# Altium PCB PCB.PcbDoc
Units mm, origin at the board's own origin, x right, y up, seen from the top; angles counter-clockwise.
Board outline 95 x 90.01 mm, 4 copper layers (Top Layer, GND, POWER, Bottom Layer), stack 0.778 mm thick; 26 components, 137 nets, 395 pads, 5 vias.
Unrouted connection lines stored in the file: 56.
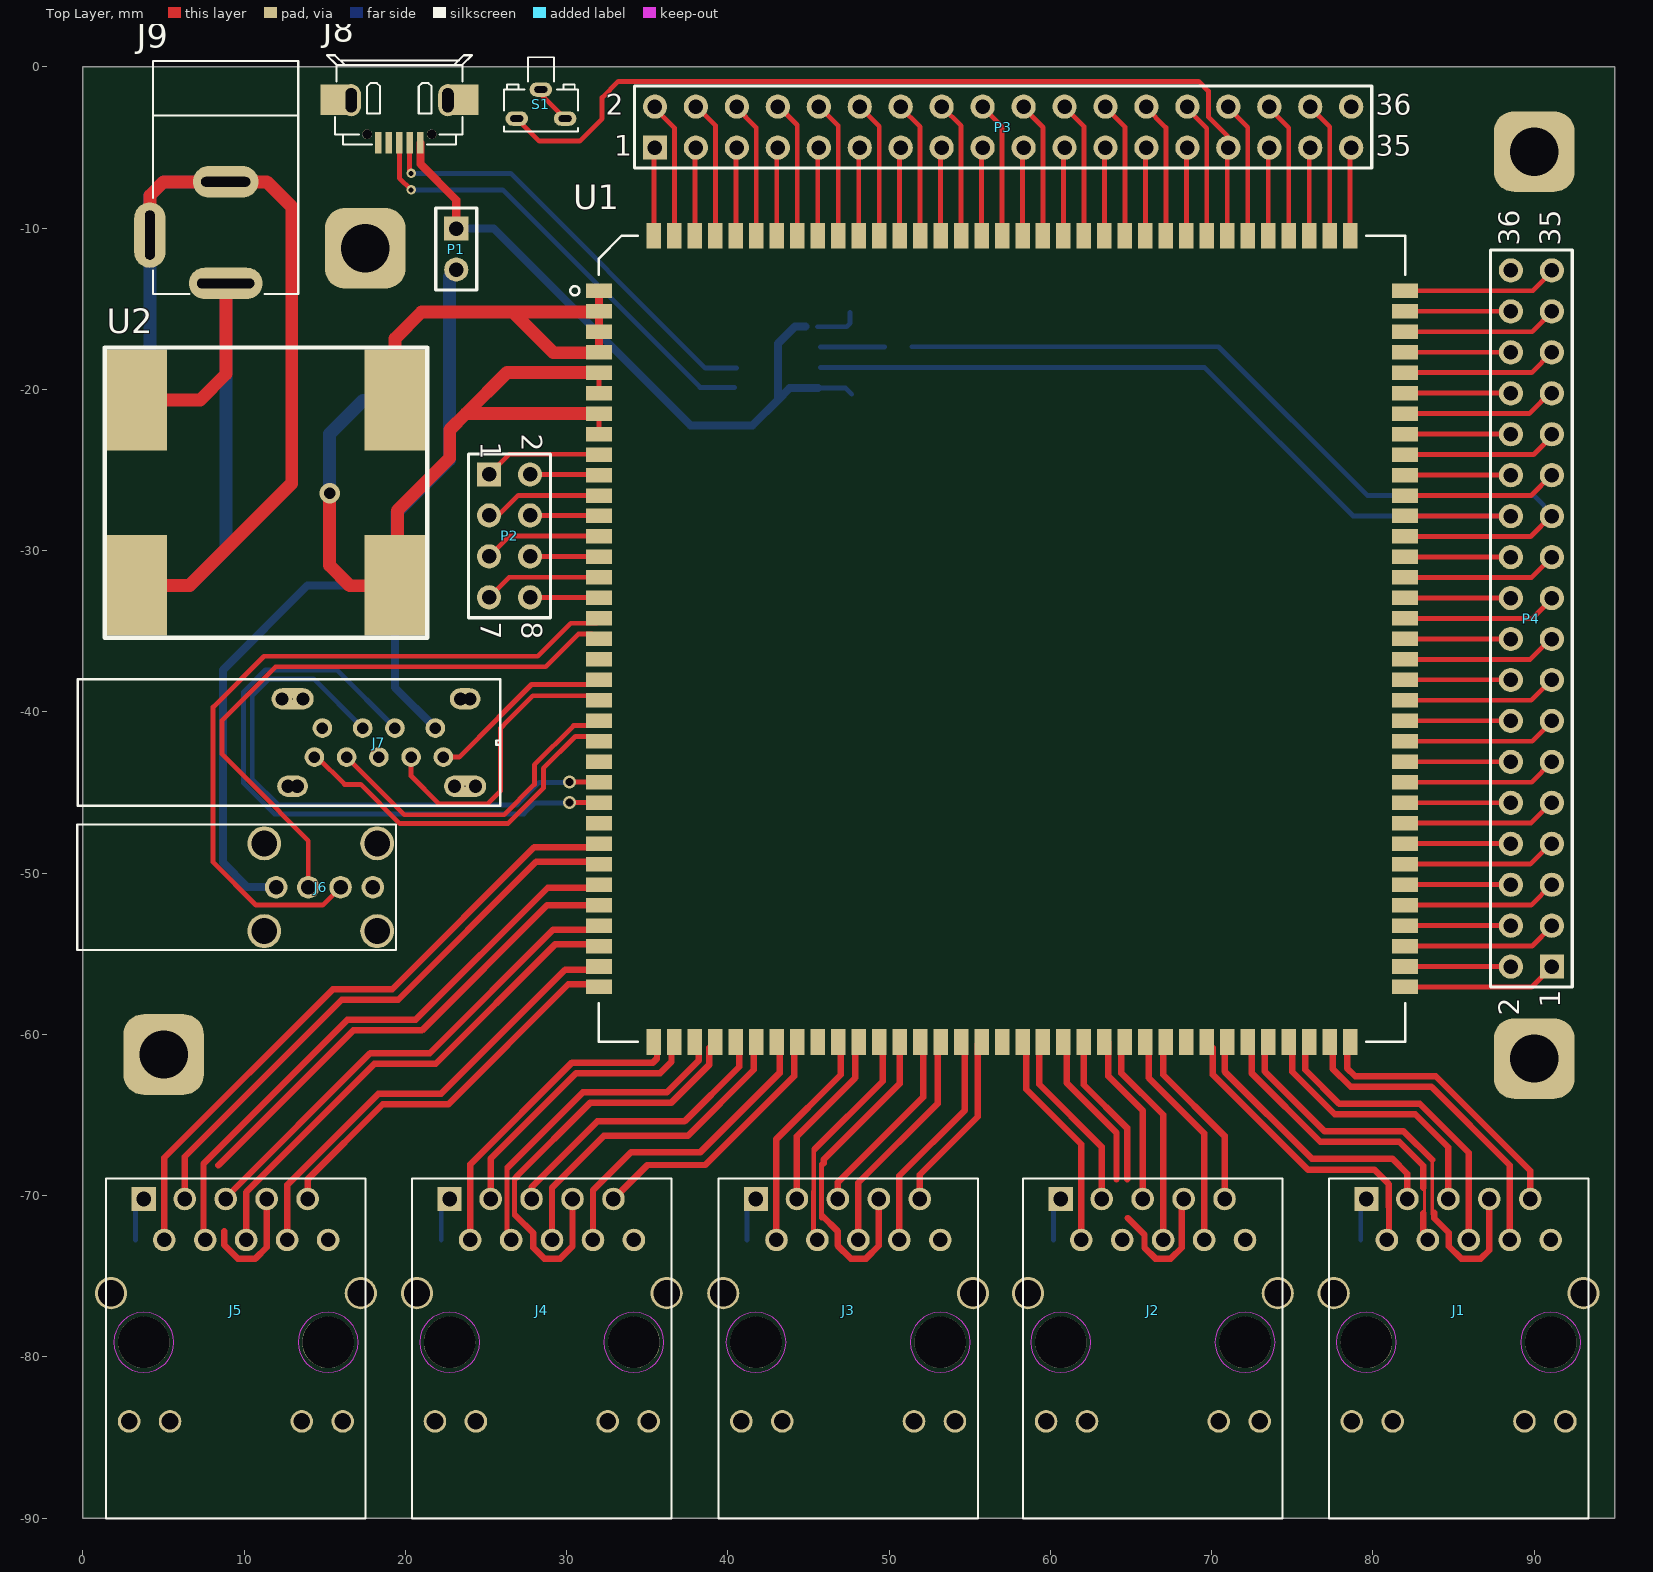
[diagram p0: Top Layer view]
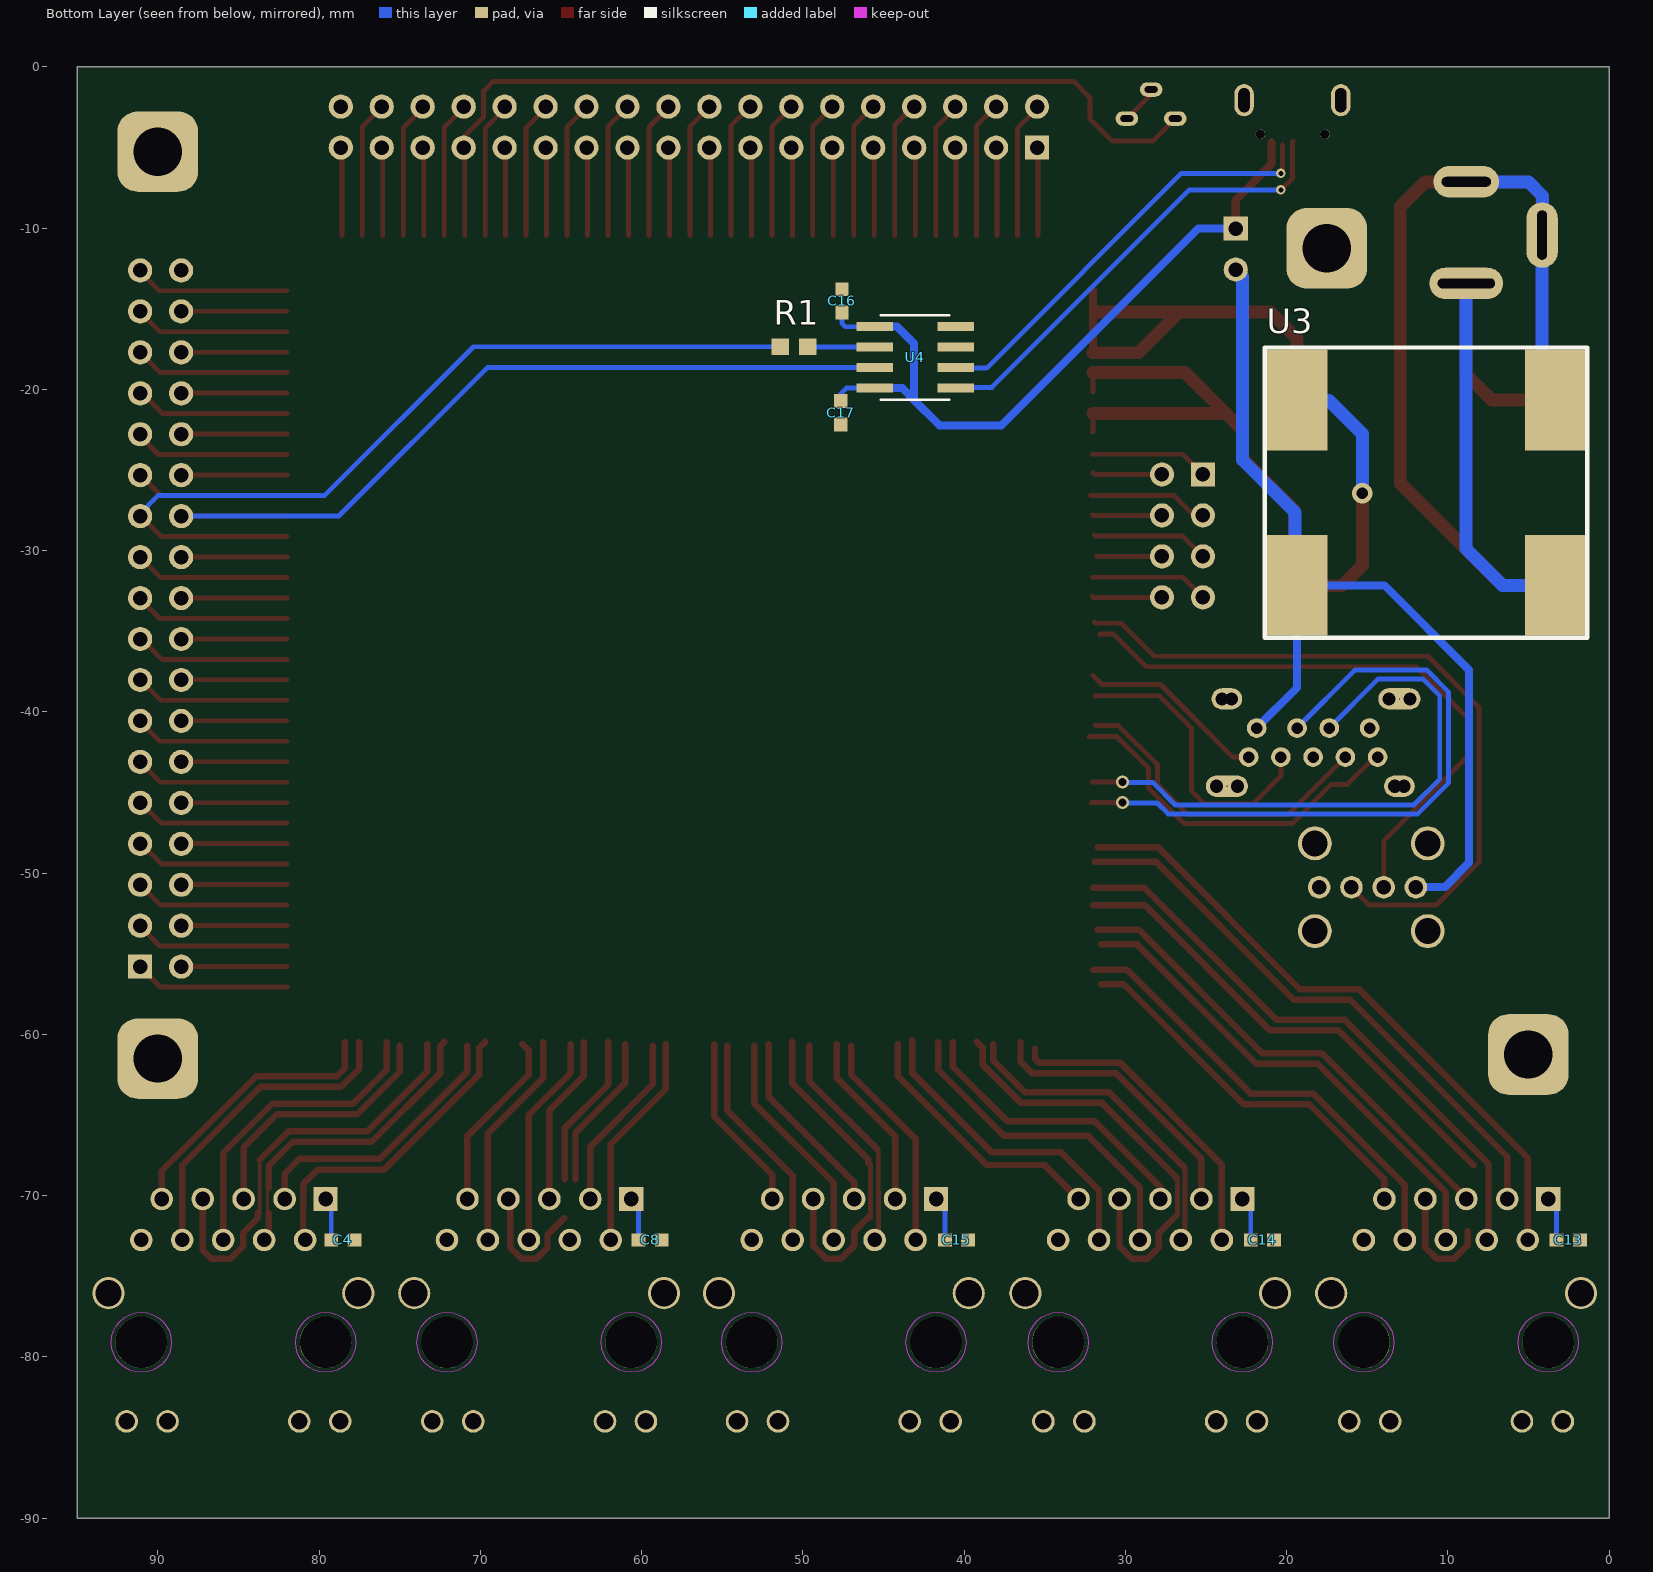
[diagram p1: Bottom Layer view, seen from below]

## Layer stack, top to bottom
Top Solder: solder mask 0.0102, Solder Resist, Dk 3.5
Top Layer: signal copper 0.0356
Dielectric 1: core 0.254, FR-4, Dk 4.2
GND: signal copper 0.036
Dielectric 3: prepreg 0.127, Dk 4.2
POWER: signal copper 0.036
Dielectric 2: core 0.254, Dk 4.2
Bottom Layer: signal copper 0.0356
Bottom Solder: solder mask 0.0102, Solder Resist, Dk 3.5

## Board outline
0,-90.014 0,0 95,0 95,-90.014

## Design rules (kind name [scope] priority, off if disabled: settings)
Clearance [All] p1: gap=0.254 ignorepadtopadclearanceinfootprint=FALSE except(0: Arc-Hole Track-Hole SMDPad-Hole THPad-Hole Via-Hole Fill-Hole Poly-Hole Region-Hole Text-Hole)
PolygonConnect [All] p1: connectstyle=Relief reliefconductorwidth=0.254 reliefentries=4 polygonreliefangle="90 Angle" airgapwidth=0.254
RoutingVias [All] p1: holewidth=0.711 width=1.27 viastyle="Through Hole" minholewidth=0.711 minwidth=1.27 maxholewidth=0.711 maxwidth=1.27
SolderMaskExpansion [All] p1: expansion=0.102
Width [All] p1: maxlimit=0.8 minlimit=0.15 preferedwidth=0.3 toplayer_prefwidth=0.4 minimp=50.000000 maximp=50.000000 favimp=50.000000
30 further rules are at their usual default settings.

## Components (designator, comment, footprint, x,y, rotation, side; value= is the part's Value field where it differs from the comment)
C4 "Cap" C0603 78.529,-72.75 r180 bottom value=0.1uF
C8 "Cap" C0603 59.471,-72.75 r180 bottom value=0.1uF
C13 "Cap" C0603 2.529,-72.75 r180 bottom value=0.1uF
C14 "Cap" C0603 21.5,-72.75 r0 bottom value=0.1uF
C15 "Cap" C0603 40.471,-72.75 r180 bottom value=0.1uF
C16 "Cap" C0603 47.575,-14.504 r270 bottom value=0.1uF
C17 "Cap" C0603 47.65,-21.446 r270 bottom value=0.1uF
J1 "RJ45_HR911130" RJ45_HR911130 79.6,-79.1 r180 top locked
J2 "RJ45_HR911130" RJ45_HR911130 60.64,-79.1 r180 top locked
J3 "RJ45_HR911130" RJ45_HR911130 41.74,-79.1 r180 top locked
J4 "RJ45_HR911130" RJ45_HR911130 22.74,-79.1 r180 top locked
J5 "RJ45_HR911130" RJ45_HR911130 3.77,-79.1 r180 top locked
J6 "USB2.0" USB2.0 11.975,-50.875 r270 top
J7 "USB3.0" USB3.0 21.85,-41 r270 top
J8 "microUSB" MICROusb 19.605,-1.981 r180 top
J9 "PWR2.5" CON\DC-JACK\4.7 8.85,-13.425 r270 top
P1 "Header 2" HDR1X2 23.15,-10.025 r270 top
P2 "Header 4X2" HDR2X4 25.185,-25.275 r270 top
P3 "Header 18X2" HDR2X18 35.475,-5 r0 top
P4 "Header 18X2" HDR2X18 91.1,-55.8 r90 top
R1 "Res2" 3-0603 50.55,-17.35 r180 bottom value=4.7K
S1 "SW_PB" SW_PB 28.4,-1.4 r90 top
U1 "MT7621A" HLK-7621 32,-13.88 r0 top locked
U2 "MP1584EN_MOD" MP1584EN_MOD 1.35,-17.4 r0 top
U3 "MP1584EN_MOD" MP1584EN_MOD 1.35,-35.4 r0 bottom
U4 "CH340N" CH340N 41.038,-20.58 r0 bottom

## Footprints (in the part's own frame and the unit in brackets; to place one, negate y for a bottom-side part, rotate by r counter-clockwise, add the part's x,y. Pads: shape width x height; smd on the part's side, far side on the other; paste and mask are expansions set on the pad)
3-0603 [mm] "Chip Resistor; Body 1.6 x 0.9 mm (LxW typ)"
  rect 1.1x1 smd: 1(-0.85,0) 2(0.85,0)
C0603 [mil]
  rect 33.78x32 smd paste+0 mask+0: 1(-28.39,0) 2(28.39,0)
  body extent 0,0 10,10, height 10
CH340N [mm]
  rect 2.27x0.558 smd paste+0 mask+0: 1(-0.516,-0.66) 2(-0.516,-1.93) 3(-0.516,-3.2) 4(-0.516,-4.47) 5(4.512,-4.47) 6(4.512,-3.2) 7(4.512,-1.93) 8(4.512,-0.66)
  silkscreen extent -0.12,-5.19 4.12,0.06, body extent 2,-2.57 2.25,-2.31, height 0.25
CON\DC-JACK\4.7 [mm]
  oval 1.956x4.572 hole 0.6 slot 3.556 at 90 deg: 1(0,0)
  oval 1.956x4.064 hole 0.6 slot 3.048 at 90 deg: 2(-6.3,0)
  oval 4.064x1.956 hole 0.6 slot 3.048 at 0 deg: 3(-3,-4.7)
  silkscreen extent -13.8,-4.5 0.65,4.5
HDR1X2 [mm] "Connector; Header; 2 Position"
  rect 1.5x1.5 hole 0.9: 1(0,0)
  round 1.5 hole 0.9: 2(2.54,0)
  silkscreen extent -1.27,-1.27 3.81,1.27
HDR2X4 [mm] "Connector; Header; 4x2 Position"
  rect 1.5x1.5 hole 0.9: 1(0,0)
  round 1.5 hole 0.9: 2(0,2.54) 3(2.54,0) 4(2.54,2.54) 5(5.08,0) 6(5.08,2.54) 7(7.62,0) 8(7.62,2.54)
  silkscreen extent -1.27,-1.27 8.89,3.81
HDR2X18 [mm] "Connector; Header; 18x2 Position"
  rect 1.5x1.5 hole 0.9: 1(0,0)
  round 1.5 hole 0.9: 2(0,2.54) 3(2.54,0) 4(2.54,2.54) 5(5.08,0) 6(5.08,2.54) 7(7.62,0) 8(7.62,2.54) 9(10.16,0) 10(10.16,2.54) 11(12.7,0) 12(12.7,2.54) 13(15.24,0) 14(15.24,2.54) 15(17.78,0) 16(17.78,2.54) 17(20.32,0) 18(20.32,2.54) 19(22.86,0) 20(22.86,2.54) 21(25.4,0) 22(25.4,2.54) 23(27.94,0) 24(27.94,2.54) 25(30.48,0) 26(30.48,2.54) 27(33.02,0) 28(33.02,2.54) 29(35.56,0) 30(35.56,2.54) 31(38.1,0) 32(38.1,2.54) 33(40.64,0) 34(40.64,2.54) 35(43.18,0) 36(43.18,2.54)
  silkscreen extent -1.27,-1.27 44.45,3.81
HLK-7621 [mm]
  rect 1.6x0.9 smd: 1(0,0) 2(0,-1.27) 3(0,-2.54) 4(0,-3.81) 5(0,-5.08) 6(0,-6.35) 7(0,-7.62) 8(0,-8.89) 9(0,-10.16) 10(0,-11.43) 11(0,-12.7) 12(0,-13.97) 13(0,-15.24) 14(0,-16.51) 15(0,-17.78) 16(0,-19.05) 17(0,-20.32) 18(0,-21.59) 19(0,-22.86) 20(0,-24.13) 21(0,-25.4) 22(0,-26.67) 23(0,-27.94) 24(0,-29.21) 25(0,-30.48) 26(0,-31.75) 27(0,-33.02) 28(0,-34.29) 29(0,-35.56) 30(0,-36.83) 31(0,-38.1) 32(0,-39.37) 33(0,-40.64) 34(0,-41.91) 35(0,-43.18) 71(50,-43.18) 72(50,-41.91) 73(50,-40.64) 74(50,-39.37) 75(50,-38.1) 76(50,-36.83) 77(50,-35.56) 78(50,-34.29) 79(50,-33.02) 80(50,-31.75) 81(50,-30.48) 82(50,-29.21) 83(50,-27.94) 84(50,-26.67) 85(50,-25.4) 86(50,-24.13) 87(50,-22.86) 88(50,-21.59) 89(50,-20.32) 90(50,-19.05) 91(50,-17.78) 92(50,-16.51) 93(50,-15.24) 94(50,-13.97) 95(50,-12.7) 96(50,-11.43) 97(50,-10.16) 98(50,-8.89) 99(50,-7.62) 100(50,-6.35) 101(50,-5.08) 102(50,-3.81) 103(50,-2.54) 104(50,-1.27) 105(50,0)
  rect 0.9x1.6 smd: 36(3.41,-46.59) 37(4.68,-46.59) 38(5.95,-46.59) 39(7.22,-46.59) 40(8.49,-46.59) 41(9.76,-46.59) 42(11.03,-46.59) 43(12.3,-46.59) 44(13.57,-46.59) 45(14.84,-46.59) 46(16.11,-46.59) 47(17.38,-46.59) 48(18.65,-46.59) 49(19.92,-46.59) 50(21.19,-46.59) 51(22.46,-46.59) 52(23.73,-46.59) 53(25,-46.59) 54(26.27,-46.59) 55(27.54,-46.59) 56(28.81,-46.59) 56(28.81,-46.59) 57(30.08,-46.59) 58(31.35,-46.59) 59(32.62,-46.59) 60(33.89,-46.59) 61(35.16,-46.59) 62(36.43,-46.59) 63(37.7,-46.59) 64(38.97,-46.59) 65(40.24,-46.59) 66(41.51,-46.59) 67(42.78,-46.59) 68(44.05,-46.59) 69(45.32,-46.59) 70(46.59,-46.59) 106(46.59,3.41) 107(45.32,3.41) 108(44.05,3.41) 109(42.78,3.41) 110(41.51,3.41) 111(40.24,3.41) 112(38.97,3.41) 113(37.7,3.41) 114(36.43,3.41) 115(35.16,3.41) 116(33.89,3.41) 117(32.62,3.41) 118(31.35,3.41) 119(30.08,3.41) 120(28.81,3.41) 121(27.54,3.41) 122(26.27,3.41) 123(25,3.41) 124(23.73,3.41) 125(22.46,3.41) 126(21.19,3.41) 127(19.92,3.41) 128(18.65,3.41) 129(17.38,3.41) 130(16.11,3.41) 131(14.84,3.41) 132(13.57,3.41) 133(12.3,3.41) 134(11.03,3.41) 135(9.76,3.41) 136(8.49,3.41) 137(7.22,3.41) 138(5.95,3.41) 139(4.68,3.41) 140(3.41,3.41)
  silkscreen extent -1.78,-46.59 50,3.41
MICROusb [mm]
  oval 1.2x2 hole 0.7 slot 1.5 at 90 deg: 1(-3.028,0.081) 1(2.972,0.081)
  rect 0.4x1.35 smd: 1(1.28,2.719) 2(0.63,2.719) 3(-0.02,2.719) 4(-0.67,2.719) 5(-1.32,2.719)
  round 0.6 hole 0.6: 6(1.98,2.194) 9(-2.02,2.194)
  rect 1.8x1.9 smd: 7(3.98,0.044) 8(-4.02,0.044)
  silkscreen extent -4.52,-2.71 4.48,2.82
MP1584EN_MOD [mm]
  rect 3.75x6.25 smd paste+0 mask+0: 1(2,-3.25) 2(2,-14.75) 3(18,-3.25) 4(18,-14.75)
  silkscreen extent 0,-18 20,0
RJ45_HR911130 [mm]
  rect 1.5x1.5 hole 0.9: 1(0,-8.89)
  round 1.4 hole 0.9: 2(-1.27,-6.35) 3(-2.54,-8.89) 4(-3.81,-6.35) 5(-5.08,-8.89) 6(-6.35,-6.35) 7(-7.62,-8.89) 8(-8.89,-6.35) 9(-10.16,-8.89) 10(-11.43,-6.35)
  round 1.4 hole 1.03: 11(0.91,4.9) 12(-1.63,4.9) 13(-9.8,4.9) 14(-12.34,4.9)
  round 2 hole 1.63: ""(-13.46,-3.05)
  round 3.2 hole 3.2 unplated: ""(-11.43,0) ""(0,0)
  round 2 hole 1.63 unplated: ""(2.03,-3.05)
  Keep-Out Layer pour cut-out: -13.293,0 -13.257,-0.363 -13.151,-0.713 -12.979,-1.035 -12.747,-1.317 -12.465,-1.549 -12.143,-1.721 -11.793,-1.827 -11.43,-1.863 -11.067,-1.827 -10.717,-1.721 -10.395,-1.549 -10.113,-1.317 -9.881,-1.035 -9.709,-0.713 -9.603,-0.363 -9.567,0 -9.603,0.363 -9.709,0.713 -9.881,1.035 -10.113,1.317 -10.395,1.549 -10.717,1.721 -11.067,1.827 -11.43,1.863 -11.793,1.827 -12.143,1.721 -12.465,1.549 -12.747,1.317 -12.979,1.035 -13.151,0.713 -13.257,0.363
  Keep-Out Layer pour cut-out: -1.863,0 -1.827,-0.363 -1.721,-0.713 -1.549,-1.035 -1.317,-1.317 -1.035,-1.549 -0.713,-1.721 -0.363,-1.827 0,-1.863 0.363,-1.827 0.713,-1.721 1.035,-1.549 1.317,-1.317 1.549,-1.035 1.721,-0.713 1.827,-0.363 1.863,0 1.827,0.363 1.721,0.713 1.549,1.035 1.317,1.317 1.035,1.549 0.713,1.721 0.363,1.827 0,1.863 -0.363,1.827 -0.713,1.721 -1.035,1.549 -1.317,1.317 -1.549,1.035 -1.721,0.713 -1.827,0.363
  silkscreen extent -13.76,-10.15 2.33,10.92
SW_PB [mm]
  oval 0.9x1.4 hole 0.4 slot 0.8 at 90 deg: 1(-1.8,1.5) 2(-1.8,-1.5) 3(0,0)
  silkscreen extent -2.6,-2.3 2,2.3
USB2.0 [mm]
  round 1.4 hole 0.9: 1(0,0) 2(0,2) 3(0,4) 4(0,6)
  round 2.1 hole 1.6: 5(2.72,-0.73) 6(-2.72,-0.73) 7(2.72,6.27) 8(-2.72,6.27)
  silkscreen extent -3.9,-12.33 3.9,7.44
USB3.0 [mil]
  round 48 hole 28 mask+0: 1(0,0) 2(0,-98.43) 3(0,-177.17) 4(0,-275.59) 5(70.87,-295.28) 6(70.87,-216.54) 7(70.87,-137.8) 8(70.87,-59.06) 9(70.87,19.68)
  oval 52x75 hole 1 mask+0: S_1(-71.26,72.83) S_4(142.13,-348.43)
  round 32 hole 32 unplated: S_1_H1(-71.26,84.33) S_1_H2(-71.26,61.33) S_2_H1(142.13,98.33) S_2_H2(142.13,47.33) S_3_H1(-71.26,-322.93) S_3_H2(-71.26,-373.93) S_4_H1(142.13,-336.93) S_4_H2(142.13,-359.93)
  oval 52x103 hole 1 mask+0: S_2(142.13,72.83) S_3(-71.26,-348.43)
  Multi-Layer lines w32: -71.26,-373.93 -71.26,-322.93 ; 142.13,-359.93 142.13,-336.93 ; 142.13,47.33 142.13,98.33 ; -71.26,61.33 -71.26,84.33
  silkscreen extent -119,-873 189,159, body extent 0,0 10,10, height 10

## Part data
C4 C8 C13 C14 C15 C16 C17: "Capacitor", LatestRevisionDate=17-Jul-2002, LatestRevisionNote="Re-released for DXP Platform.", PackageDescription="Radial Cap, Thru-Hole; 2 Leads; 0.3 in Pin Spacing", PackageReference=RAD-0.3, Published=8-Jun-2000, Publisher="Altium Limited"
P1: "Header, 2-Pin", LatestRevisionDate=17-Jul-2002, LatestRevisionNote="Re-released for DXP Platform.", Publisher="Altium Limited"
P2: "Header, 4-Pin, Dual row", LatestRevisionDate=17-Jul-2002, LatestRevisionNote="Re-released for DXP Platform.", Publisher="Altium Limited"
P3 P4: "Header, 18-Pin, Dual row", LatestRevisionDate=17-Jul-2002, LatestRevisionNote="Re-released for DXP Platform.", Publisher="Altium Limited"
R1: "Resistor", LatestRevisionDate=17-Jul-2002, LatestRevisionNote="Re-released for DXP Platform.", PackageDescription="Axial Device, Thru-Hole; 2 Leads; 0.4 in Pin Spacing", PackageReference=AXIAL-0.4, Published=8-Jun-2000, Publisher="Altium Limited"

## Free pads (board coordinates)
  rrect50% 5x5 hole 3: 1(17.5,-11.25) 2(90,-5.25) 3(5,-61.25) 4(90,-61.5)

## Via types
v1: diameter 0.8, hole 0.5, Top Layer to Bottom Layer, 2 vias
v2: diameter 0.6, hole 0.3, Top Layer to Bottom Layer, 2 vias
v3: diameter 1.27, hole 0.711, Top Layer to Bottom Layer, 1 vias

## Nets (pads, with @x,y where several pads share a name; then routed paths per layer and width w, separated by ;. In a path a pad name is that pad's centre, name@x,y a point inside that pad or via, vN(x,y) a via of type N, cw(c..) or ccw(c..) an arc to the next point about the centre after c; other vN are vias at no path point)
3V3: U1.1 U1.2 U1.3 U1.4 U2.3 | length 26.9
  Top Layer w0.5: U1.4@32,-17.625 U1.3 U1.2 U1.1
  Top Layer w0.8: U2.3 19.35,-16.85 21,-15.2 26.35,-15.2 26.65,-15.2 ; U1.2@31.675,-15.2 26.65,-15.2 ; U1.4@32,-17.725 29.175,-17.725 26.65,-15.2
5V: C16.2 C17.1 J8.5 P1.1 U4.5 U4.8 | length 45.4
  Top Layer w0.5: J8.5 20.925,-6.025 23.15,-8.25 P1.1
  Bottom Layer w0.3: U4.8 47.295,-19.92 C17.1@47.675,-20.3 ; U4.5 47.365,-16.11 47.575,-15.9 C16.2
  Bottom Layer w0.5: P1.1 25.475,-10.025 37.675,-22.225 41.525,-22.225 43.1,-20.65 ; U4.5@44.8,-16.1 44.15,-16.1 43.1,-17.15 43.1,-20.65 ; U4.8@45.575,-19.925 43.825,-19.925 43.1,-20.65
5VD: J6.1 J7.1 P1.2 U3.3 | length 59.8
  Bottom Layer w0.5: J6.1@12,-50.85 10.175,-50.85 8.675,-49.35 8.675,-37.4 13.925,-32.15 U3.3 19.35,-38.5 J7.1@21.825,-40.975
  Bottom Layer w0.8: U3.3@19.475,-32.2 19.475,-27.625 22.725,-24.375 22.725,-12.99 P1.2
12V: J9.1 U2.1 U3.1 | length 34.9
  Top Layer w0.8: U2.1 7.275,-20.65 8.875,-19.05 J9.1@8.875,-13.45
  Bottom Layer w0.8: U3.1 6.6,-32.15 8.875,-29.875 J9.1@8.875,-13.225
A_POR_BPS: P4.11 U1.81 | length 9.6
  Top Layer w0.3: U1.81 89.84,-44.36 P4.11
CH340_RX: P4.24 U1.94 U4.7 | length 53.2
  Top Layer w0.3: U1.94 88.45,-27.85 P4.24@88.5,-27.9
  Bottom Layer w0.3: U4.7@45.725,-18.645 69.57,-18.645 78.775,-27.85 88.4,-27.85 P4.24@88.525,-27.725
CH340_TX: P4.23 R1.1 U1.93 | length 53.8
  Top Layer w0.3: U1.93 89.78,-29.12 P4.23@91.1,-27.8
  Bottom Layer w0.3: R1.1 70.425,-17.35 79.65,-26.575 89.975,-26.575 P4.23@91.225,-27.825
CTS2_N: P2.7 U1.15 | length 7.4
  Top Layer w0.3: P2.7 26.43,-31.65 U1.15@32.025,-31.65
CTS3_N: P2.1 U1.9 | length 7.4
  Top Layer w0.3: P2.1 26.435,-24.025 U1.9@32.05,-24.025
ESW_P0_LED_0: P4.5 U1.75 | length 9.6
  Top Layer w0.3: U1.75 89.82,-51.98 P4.5@91.1,-50.7
ESW_P0_LED_1: P4.6 U1.76 | length 6.5
  Top Layer w0.3: U1.76 88.41,-50.71 P4.6@88.5,-50.8
ESW_P1_LED_0: P4.4 U1.74 | length 6.5
  Top Layer w0.3: U1.74 88.45,-53.25 P4.4@88.5,-53.3
ESW_P2_LED_0: P4.3 U1.73 | length 9.6
  Top Layer w0.3: U1.73 89.88,-54.52 P4.3@91.1,-53.3
ESW_P3_LED_0: P4.2 U1.72 | length 6.5
  Top Layer w0.3: U1.72 88.49,-55.79 P4.2@88.5,-55.8
ESW_P4_LED_0: P4.1 U1.71 | length 9.6
  Top Layer w0.3: U1.71 89.84,-57.06 P4.1
GE_MDC: P4.13 U1.83 | length 9.6
  Top Layer w0.3: U1.83 89.88,-41.82 P4.13@91.1,-40.6
GE_MDIO: P4.12 U1.82 | length 6.6
  Top Layer w0.3: U1.82 88.59,-43.09 P4.12@88.6,-43.1
GE_RXCLK: P4.21 U1.91 | length 9.6
  Top Layer w0.3: U1.91 89.84,-31.66 P4.21
GE_RXD0: P4.19 U1.89 | length 9.6
  Top Layer w0.3: U1.89 89.9,-34.2 P4.19@91.1,-33
GE_RXD1: P4.18 U1.88 | length 6.5
  Top Layer w0.3: U1.88 88.47,-35.47 P4.18@88.5,-35.5
GE_RXD2: P4.17 U1.87 | length 9.5
  Top Layer w0.3: U1.87 89.76,-36.74 P4.17@91,-35.5
GE_RXD3: P4.16 U1.86 | length 6.5
  Top Layer w0.3: U1.86 88.49,-38.01 P4.16@88.5,-38
GE_RXDV: P4.20 U1.90 | length 6.6
  Top Layer w0.3: U1.90 88.53,-32.93 P4.20@88.6,-33
GE_TXCLK: P4.15 U1.85 | length 9.6
  Top Layer w0.3: U1.85 89.82,-39.28 P4.15@91.1,-38
GE_TXD0: P4.10 U1.80 | length 6.5
  Top Layer w0.3: U1.80 88.43,-45.63 P4.10@88.5,-45.7
GE_TXD1: P4.9 U1.79 | length 9.6
  Top Layer w0.3: U1.79 89.8,-46.9 P4.9@91.1,-45.6
GE_TXD2: P4.8 U1.78 | length 6.6
  Top Layer w0.3: U1.78 88.57,-48.17 P4.8@88.6,-48.2
GE_TXD3: P4.7 U1.77 | length 9.5
  Top Layer w0.3: U1.77 89.76,-49.44 P4.7@91,-48.2
GE_TXEN: P4.14 U1.84 | length 6.6
  Top Layer w0.3: U1.84 88.55,-40.55 P4.14@88.6,-40.5
GND: C4.2 C8.2 C13.2 C14.1 C15.2 C16.1 C17.2 J1.10 J1.12 J1.14 J2.10 J2.12 J2.14 J3.10 J3.12 J3.14 J4.10 J4.12 J4.14 J5.10 J5.12 J5.14 J6.4 J6.5 J6.6 J6.7 J6.8 J7.4 J7.7 J7.S_1 J7.S_2 J7.S_3 J7.S_4 J8.1 J8.6 J8.7 J8.8 J8.9 P3.16 P3.22 P4.22 pad.1 pad.2 pad.3 pad.4 S1.2 S1.3 U1.5 U1.6 U1.7 U1.8 U1.19 U1.24 U1.27 U1.44 U1.53 U1.62 U1.92 U1.119 U1.125 U2.4 U3.4 U4.3 | length 75.9
  Top Layer w0.3: S1.3 28.4,-1.7 S1.2 ; U1.7 32,-22.6 U1.8@32.05,-22.65 ; U1.6@32,-20.175 U1.5 ; P3.16@53.3,-2.5 54.46,-3.66 U1.125 ; P3.22@60.9,-2.5 62.08,-3.68 U1.119 ; U1.92 88.59,-30.39 P4.22@88.6,-30.4
  Top Layer w0.8: v3(15.3,-26.45) 15.3,-30.925 16.55,-32.175 U2.4@19.55,-32.175 ; U2.4@19.5,-31.75 19.5,-27.5 22.75,-24.25 22.75,-22.5 23.75,-21.5 ; U1.7 23.75,-21.5 ; U1.5 26.29,-18.96 23.75,-21.5
  Bottom Layer w0.8: v3(15.3,-26.45) 15.3,-22.75 17.375,-20.675 U3.4@19.5,-20.675
GND1: J9.2 J9.3 U2.2 U3.2 | length 58.8
  Top Layer w0.8: U2.2@3.75,-32.15 6.625,-32.15 12.95,-25.825 12.95,-8.675 11.4,-7.125 J9.2 5,-7.125 4.15,-7.975 J9.3 J9.3@4.15,-10.45
  Bottom Layer w0.8: J9.3@4.125,-10.375 4.125,-8 5,-7.125 J9.2 ; U3.2@4.15,-20.475 J9.3
GPIO0: P4.34 U1.104 | length 6.6
  Top Layer w0.3: U1.104 88.55,-15.15 P4.34@88.6,-15.2
I2C_CLK: P4.26 U1.96 | length 6.5
  Top Layer w0.3: U1.96 88.41,-25.31 P4.26@88.5,-25.4
I2C_SDA: P4.27 U1.97 | length 9.7
  Top Layer w0.3: U1.97 89.96,-24.04 P4.27@91.2,-22.8
JTAG_CLK: P3.17 U1.124 | length 5.4
  Top Layer w0.3: U1.124 55.73,-5.27 P3.17@55.9,-5.1
JTAG_DI: P3.19 U1.122 | length 5.5
  Top Layer w0.3: U1.122 58.27,-5.03 P3.19@58.3,-5
JTAG_DO: P3.20 U1.121 | length 8.5
  Top Layer w0.3: P3.20@58.3,-2.5 59.54,-3.74 U1.121
JTAG_MS: P3.21 U1.120 | length 5.4
  Top Layer w0.3: P3.21@60.7,-5.1 60.81,-5.21 U1.120
JTAG_RST: P3.18 U1.123 | length 8.5
  Top Layer w0.3: P3.18@55.8,-2.5 57,-3.7 U1.123
ND_ALE: P3.3 U1.138 | length 5.4
  Top Layer w0.3: U1.138 37.95,-5.15 P3.3@38,-5.1
ND_CLE: P3.4 U1.137 | length 8.6
  Top Layer w0.3: P3.4@38,-2.4 39.22,-3.62 U1.137
ND_CS_N: P3.5 U1.136 | length 5.5
  Top Layer w0.3: U1.136 40.49,-5.01 P3.5@40.5,-5
ND_D0: P3.8 U1.133 | length 8.4
  Top Layer w0.3: P3.8@43.2,-2.5 44.3,-3.6 U1.133
ND_D1: P3.9 U1.132 | length 5.5
  Top Layer w0.3: U1.132 45.57,-5.13 P3.9@45.7,-5
ND_D2: P3.10 U1.131 | length 8.6
  Top Layer w0.3: P3.10@45.6,-2.4 46.84,-3.64 U1.131
ND_D3: P3.11 U1.130 | length 5.5
  Top Layer w0.3: P3.11@48.1,-5 48.11,-5.01 U1.130
ND_D4: P3.12 U1.129 | length 8.5
  Top Layer w0.3: P3.12@48.2,-2.5 49.38,-3.68 U1.129
ND_D5: P3.13 U1.128 | length 5.4
  Top Layer w0.3: U1.128 50.65,-5.15 P3.13@50.7,-5.1
ND_D6: P3.14 U1.127 | length 8.5
  Top Layer w0.3: P3.14@50.7,-2.5 51.92,-3.72 U1.127
ND_D7: P3.15 U1.126 | length 5.4
  Top Layer w0.3: U1.126 53.19,-5.11 P3.15@53.2,-5.1
ND_RB_N: P3.7 U1.134 | length 5.6
  Top Layer w0.3: U1.134 43.03,-4.97 P3.7@43.1,-4.9
ND_RE_N: P3.6 U1.135 | length 8.5
  Top Layer w0.3: P3.6@40.5,-2.5 41.76,-3.76 U1.135
ND_WE_N: P3.2 U1.139 | length 8.5
  Top Layer w0.3: P3.2@35.4,-2.5 36.68,-3.78 U1.139
ND_WP: P3.1 U1.140 | length 5.5
  Top Layer w0.3: P3.1@35.4,-5 35.41,-5.01 U1.140
NetC4_1: C4.1 J1.1 | length 2.6
  Bottom Layer w0.3: C4.1 79.25,-70.5 J1.1@79.5,-70.25
NetC8_1: C8.1 J2.1 | length 2.6
  Bottom Layer w0.3: C8.1 60.192,-70.558 J2.1@60.5,-70.25
NetC13_1: C13.1 J5.1 | length 2.7
  Bottom Layer w0.3: C13.1 3.25,-70.75 J5.1@3.75,-70.25
NetC14_2: C14.2 J4.1 | length 2.7
  Bottom Layer w0.3: C14.2 22.221,-70.779 J4.1@22.75,-70.25
NetC15_1: C15.1 J3.1 | length 2.6
  Bottom Layer w0.3: C15.1 41.192,-70.558 J3.1@41.5,-70.25
NetJ1_2: J1.2 U1.63 | length 19.5
  Top Layer w0.4: U1.63 70.066,-60.836 70.066,-62.491 75.975,-68.4 80.1,-68.4 80.986,-69.286 80.986,-70.702 81,-70.716 J1.2@81,-72.9
NetJ1_3: J1.3 U1.64 | length 17.1
  Top Layer w0.4: U1.64@70.8,-60.7 70.8,-62.3 76.2,-67.7 81.2,-67.7 82.14,-68.64 J1.3
NetJ1_4: J1.4 U1.65 | length 19.7
  Top Layer w0.2: 83.2,-71.05 83.2,-69.575
  Top Layer w0.4: U1.65 72.5,-60.73 72.5,-62.425 76.729,-66.654 81.629,-66.654 83.121,-68.146 83.121,-69.5 ; 83.121,-71.1 83.121,-72.461 J1.4
NetJ1_5: J1.5 U1.67 | length 16.4
  Top Layer w0.4: U1.67@75,-60.7 75,-62.325 77.629,-64.954 82.629,-64.954 84.68,-67.005 J1.5
NetJ1_6: J1.6 U1.68 | length 19.4
  Top Layer w0.4: U1.68@75.8,-60.5 75.8,-62.2 77.9,-64.3 82.9,-64.3 85.95,-67.35 J1.6
NetJ1_7: J1.7 U1.66 | length 26.4
  Top Layer w0.2: 83.675,-71.175 83.675,-67.775
  Top Layer w0.4: U1.66@73.3,-60.6 73.3,-62.3 77,-66 81.9,-66 83.675,-67.775 ; 83.804,-71.05 83.804,-71.404 84.7,-72.3 84.7,-73.132 85.472,-73.904 86.696,-73.904 87.22,-73.38 J1.7
NetJ1_8: J1.8 U1.69 | length 19.7
  Top Layer w0.4: U1.69@77.5,-60.5 77.5,-62.125 78.629,-63.254 83.629,-63.254 88.49,-68.115 J1.8
NetJ1_9: J1.9 U1.70 | length 17.3
  Top Layer w0.4: U1.70@78.4,-60.5 78.4,-62.1 78.9,-62.6 83.9,-62.6 89.76,-68.46 J1.9
NetJ2_2: J2.2 U1.54 | length 13.6
  Top Layer w0.4: U1.54@58.5,-60.6 58.5,-63.4 61.91,-66.81 J2.2
NetJ2_3: J2.3 U1.55 | length 11.1
  Top Layer w0.4: U1.55@59.3,-60.7 59.3,-63.1 63.18,-66.98 J2.3
NetJ2_4: J2.4 U1.56 | length 9.7
  Top Layer w0.4: U1.56@61,-60.6 61,-63 64.1,-66.1 64.1,-68.975
NetJ2_5: J2.5 U1.58 | length 10.6
  Top Layer w0.4: U1.58@63.6,-60.5 63.6,-62.6 65.72,-64.72 J2.5
NetJ2_6: J2.6 U1.59 | length 13.2
  Top Layer w0.4: U1.59@64.4,-60.6 64.4,-62.4 66.99,-64.99 J2.6
NetJ2_7: J2.7 U1.57 | length 17.9
  Top Layer w0.4: 62.075,-63.05 62.075,-63.125 64.754,-65.804 64.754,-68.975 ; 62.08,-63.08 U1.57 ; 64.789,-71.389 65.836,-72.436 65.836,-73.228 66.512,-73.904 67.468,-73.904 68.144,-73.228 68.144,-70.326 J2.7
NetJ2_8: J2.8 U1.60 | length 13.7
  Top Layer w0.4: U1.60@66.1,-60.5 66.1,-62.7 69.53,-66.13 J2.8
NetJ2_9: J2.9 U1.61 | length 11.3
  Top Layer w0.4: U1.61@67.4,-60.6 67,-61 67,-62.5 70.8,-66.3 J2.9
NetJ3_2: J3.2 U1.45 | length 13.7
  Top Layer w0.4: J3.2 43.01,-66.49 47,-62.5 U1.45@47,-60.7
NetJ3_3: J3.3 U1.46 | length 11.1
  Top Layer w0.4: J3.3 44.28,-66.32 47.9,-62.7 U1.46@47.9,-60.6
NetJ3_4: J3.4 U1.47 | length 13.8
  Top Layer w0.3: J3.4@45.299,-72.75 45.299,-70.677 ; 45.309,-70.667 45.309,-69.753 ; 45.325,-69.744 45.325,-67.125
  Top Layer w0.4: 45.375,-67.125 49.6,-62.9 U1.47@49.6,-60.7
NetJ3_5: J3.5 U1.49 | length 11.8
  Top Layer w0.4: J3.5 46.82,-69.18 52.1,-63.9 U1.49@52.1,-60.6
NetJ3_6: J3.6 U1.50 | length 14.1
  Top Layer w0.4: J3.6 48.09,-69.21 53,-64.3 U1.50@53,-60.7
NetJ3_7: J3.7 U1.48 | length 21.2
  Top Layer w0.3: 45.804,-71.379 45.804,-68.025
  Top Layer w0.4: 45.85,-71.25 46.8,-72.2 46.8,-73.092 47.612,-73.904 48.568,-73.904 49.36,-73.112 J3.7 ; 45.929,-68 45.929,-67.771 50.65,-63.05 U1.48
NetJ3_8: J3.8 U1.51 | length 13.7
  Top Layer w0.4: J3.8 50.63,-68.77 54.7,-64.7 U1.51@54.7,-60.7
NetJ3_9: J3.9 U1.52 | length 11.1
  Top Layer w0.4: J3.9 51.9,-68.7 55.5,-65.1 U1.52@55.5,-60.6
NetJ4_2: J4.2 U1.36 | length 19.6
  Top Layer w0.4: J4.2 24.01,-68.065 30.329,-61.746 35.354,-61.746 35.6,-61.5 U1.36@35.6,-60.9
NetJ4_3: J4.3 U1.37 | length 17.4
  Top Layer w0.4: J4.3 25.28,-67.72 30.6,-62.4 35.8,-62.4 36.5,-61.7 U1.37@36.5,-60.5
NetJ4_4: J4.4 U1.38 | length 20.1
  Top Layer w0.3: J4.4@26.3,-72.75 26.3,-68.25
  Top Layer w0.4: 26.35,-68.25 31,-63.6 36.2,-63.6 38.2,-61.6 U1.38@38.2,-60.6
NetJ4_5: J4.5 U1.40 | length 18.2
  Top Layer w0.4: J4.5 27.82,-69.48 31.9,-65.4 37.3,-65.4 40.7,-62 U1.40@40.7,-60.5
NetJ4_6: J4.6 U1.41 | length 20.5
  Top Layer w0.4: J4.6 29.09,-69.51 32.3,-66.3 37.5,-66.3 41.6,-62.2 U1.41@41.6,-60.5
NetJ4_7: J4.7 U1.39 | length 27.2
  Top Layer w0.3: 26.754,-71.225 26.754,-68.9
  Top Layer w0.4: 26.812,-71.212 27.936,-72.336 27.936,-73.228 28.612,-73.904 29.596,-73.904 30.36,-73.14 J4.7 ; 26.904,-68.875 26.904,-68.796 31.446,-64.254 36.471,-64.254 38.854,-61.871 38.854,-60.836 U1.39
NetJ4_8: J4.8 U1.42 | length 19.7
  Top Layer w0.4: J4.8 31.63,-69.67 34,-67.3 38.3,-67.3 43.2,-62.4 U1.42@43.2,-60.4
NetJ4_9: J4.9 U1.43 | length 16.4
  Top Layer w0.4: J4.9 35.01,-68.1 38.6,-68.1 44.1,-62.6 U1.43@44.1,-60.6
NetJ5_2: J5.2 U1.28 | length 39.7
  Top Layer w0.4: J5.2 5.04,-67.66 15.5,-57.2 19.175,-57.2 27.975,-48.4 U1.28@31.7,-48.4
NetJ5_3: J5.3 U1.29 | length 35.8
  Top Layer w0.4: J5.3 6.31,-67.59 16.046,-57.854 19.546,-57.854 28.1,-49.3 U1.29@31.9,-49.3
NetJ5_4: J5.4 U1.30 | length 36.4
  Top Layer w0.4: J5.4 7.475,-72.645 7.475,-68.025 16.4,-59.1 20.625,-59.1 28.825,-50.9 U1.30@32,-50.9
NetJ5_5: J5.5 U1.32 | length 29.8
  Top Layer w0.4: J5.5 8.85,-70.125 17.804,-61.171 21.504,-61.171 29.175,-53.5 U1.32@31.7,-53.5
NetJ5_6: J5.6 U1.33 | length 30.7
  Top Layer w0.4: J5.6 10.12,-69.78 18.075,-61.825 21.875,-61.825 29.3,-54.4 U1.33@31.5,-54.4
NetJ5_7: J5.7 U1.31 | length 37.4
  Top Layer w0.4: 8.4,-68.125 16.771,-59.754 21.021,-59.754 28.795,-51.98 U1.31 ; 8.75,-72.2 8.75,-73.05 9.604,-73.904 10.696,-73.904 11.39,-73.21 J5.7
NetJ5_8: J5.8 U1.34 | length 28.3
  Top Layer w0.4: J5.8 12.66,-69.34 18.325,-63.675 19.54,-63.675 19.544,-63.671 22.229,-63.671 29.9,-56 U1.34@32,-56
NetJ5_9: J5.9 U1.35 | length 23.8
  Top Layer w0.4: J5.9 13.93,-68.995 18.596,-64.329 22.671,-64.329 30.1,-56.9 U1.35@31.5,-56.9
NetJ6_2: J6.2 U1.18 | length 37.7
  Top Layer w0.3: J6.2 13.975,-49.658 13.975,-48 12.2,-46.225 12.2,-46.2 8.625,-42.625 8.625,-40.525 11.95,-37.2 28.7,-37.2 30.725,-35.175 31.55,-35.175 U1.18@31.575,-35.2
NetJ6_3: J6.3 U1.17 | length 45.1
  Top Layer w0.3: J6.3 14.871,-51.979 10.729,-51.979 8.071,-49.321 8.071,-39.704 11.225,-36.55 28.2,-36.55 30.25,-34.5 31.85,-34.5 U1.17@31.925,-34.425
NetJ7_2: J7.2 U1.26 | length 40.4
  Top Layer w0.3: v1(30.175,-45.625) 32.075,-45.625 U1.26@32.1,-45.65
  Bottom Layer w0.3: J7.2 15.746,-37.396 11.321,-37.396 9.946,-38.771 9.946,-44.404 11.871,-46.329 27.346,-46.329 28.025,-45.65 v1@30.225,-45.65
NetJ7_3: J7.3 U1.25 | length 36.5
  Top Layer w0.3: v1(30.175,-44.35) U1.25@32.05,-44.35
  Bottom Layer w0.3: J7.3 14.3,-37.95 11.55,-37.95 10.5,-39 10.5,-44.175 12.1,-45.775 26.9,-45.775 28.3,-44.375 v1@30.15,-44.375
NetJ7_5: J7.5 U1.23 | length 22.6
  Top Layer w0.3: J7.5 14.525,-42.8 16.225,-44.5 17.225,-44.5 19.654,-46.929 26.354,-46.929 28.554,-44.729 28.554,-43.504 30.533,-41.525 32.2,-41.525 U1.23@32.25,-41.575
NetJ7_6: J7.6 U1.22 | length 20
  Top Layer w0.3: J7.6 19.925,-46.375 26.125,-46.375 28,-44.5 28,-43.275 30.425,-40.85 31.825,-40.85 U1.22@31.875,-40.8
NetJ7_8: J7.8 U1.21 | length 18.5
  Top Layer w0.3: J7.8 20.35,-43.975 22.075,-45.7 25.1,-45.7 25.9,-44.9 25.9,-41.008 26.325,-40.583 26.325,-40.575 27.9,-39 31.875,-39 U1.21@31.9,-39.025
NetJ7_9: J7.9 U1.20 | length 11.7
  Top Layer w0.3: J7.9 23.325,-42.8 25.771,-40.354 25.771,-40.346 27.817,-38.3 31.45,-38.3 U1.20@32,-37.75
NetJ8_3: J8.3 U4.1 | length 28.4
  Top Layer w0.3: J8.3@19.6,-4.625 19.625,-4.65 J8.3 19.625,-6.9 v2(20.35,-7.625)
  Bottom Layer w0.3: v2(20.35,-7.625) 26.025,-7.625 38.275,-19.875 U4.1@40.4,-19.875
NetJ8_4: J8.4 U4.2 | length 27
  Top Layer w0.3: J8.4@20.25,-4.825 20.25,-6.5 v2(20.35,-6.6)
  Bottom Layer w0.3: v2(20.35,-6.6) 26.525,-6.6 38.6,-18.675 U4.2@40.55,-18.675
NetR1_2: R1.2 U4.6 | length 4
  Bottom Layer w0.3: U4.6@45.75,-17.375 49.7,-17.375 R1.2@49.725,-17.35
PCIE_CK0_M: P3.23 U1.118 | length 5.4
  Top Layer w0.3: P3.23@63.3,-5.1 63.35,-5.15 U1.118
PCIE_CK0_P: P3.24 U1.117 | length 8.5
  Top Layer w0.3: P3.24@63.4,-2.5 64.62,-3.72 U1.117
PCIE_CK1_M: P3.31 U1.110 | length 5.4
  Top Layer w0.3: U1.110 73.51,-5.19 P3.31@73.6,-5.1
PCIE_CK1_P: P3.30 U1.111 | length 8.5
  Top Layer w0.3: P3.30@71,-2.5 72.24,-3.74 U1.111
PCIE_CK2_M: P4.32 U1.102 | length 6.6
  Top Layer w0.3: U1.102 88.59,-17.69 P4.32@88.6,-17.7
PCIE_CK2_P: P4.33 U1.103 | length 9.6
  Top Layer w0.3: U1.103 89.88,-16.42 P4.33@91.1,-15.2
PCIE_RXN0: P3.27 U1.114 | length 5.5
  Top Layer w0.3: P3.27@68.4,-5 68.43,-5.03 U1.114
PCIE_RXN1: P3.32 U1.109 | length 8.5
  Top Layer w0.3: P3.32@73.5,-2.5 74.78,-3.78 U1.109
PCIE_RXN2: P4.31 U1.101 | length 9.6
  Top Layer w0.3: U1.101 89.84,-18.96 P4.31
PCIE_RXP0: P3.28 U1.113 | length 8.5
  Top Layer w0.3: P3.28@68.4,-2.5 69.7,-3.8 U1.113
PCIE_RXP1: P3.33 U1.108 | length 5.4
  Top Layer w0.3: U1.108 76.05,-5.15 P3.33@76.1,-5.1
PCIE_RXP2: P4.30 U1.100 | length 6.5
  Top Layer w0.3: U1.100 88.43,-20.23 P4.30@88.5,-20.3
PCIE_TX0_M: P3.26 U1.115 | length 8.5
  Top Layer w0.3: P3.26@65.9,-2.5 67.16,-3.76 U1.115
PCIE_TX0_P: P3.25 U1.116 | length 5.4
  Top Layer w0.3: U1.116 65.89,-5.11 P3.25@65.9,-5.1
PCIE_TX1_M: P3.34 U1.107 | length 8.5
  Top Layer w0.3: P3.34@76.1,-2.5 77.32,-3.72 U1.107
PCIE_TX1_P: P3.35 U1.106 | length 5.4
  Top Layer w0.3: U1.106 78.59,-5.21 P3.35@78.7,-5.1
PCIE_TX2_M: P4.28 U1.98 | length 6.5
  Top Layer w0.3: U1.98 88.47,-22.77 P4.28@88.5,-22.8
PCIE_TX2_P: P4.29 U1.99 | length 9.7
  Top Layer w0.3: U1.99 89.7,-21.5 P4.29@91.1,-20.1
PERST_N: P4.35 U1.105 | length 9.6
  Top Layer w0.3: U1.105 89.92,-13.88 P4.35@91.1,-12.7
RESET: P4.25 U1.95 | length 9.6
  Top Layer w0.3: U1.95 89.82,-26.58 P4.25@91.1,-25.3
RTS2_N: P2.6 U1.14 | length 4.1
  Top Layer w0.3: P2.6 31.755,-30.355 U1.14@31.775,-30.375
RTS3_N: P2.8 U1.16 | length 4.4
  Top Layer w0.3: P2.8 31.98,-32.895 U1.16@32.05,-32.825
RXD2: P2.3 U1.11 | length 7.5
  Top Layer w0.3: P2.3 25.76,-27.815 27,-26.575 U1.11@32.15,-26.575
RXD3: P2.5 U1.13 | length 7.3
  Top Layer w0.3: P2.5 26.44,-29.1 31.85,-29.1 U1.13@31.925,-29.025
TXD2: P2.2 U1.10 | length 4.3
  Top Layer w0.3: P2.2 31.9,-25.275 U1.10@32,-25.175
TXD3: P2.4 U1.12 | length 4.3
  Top Layer w0.3: P2.4 31.985,-27.815 U1.12@32.025,-27.775
WPS: P3.29 S1.1 U1.112 | length 55.5
  Top Layer w0.3: S1.1 28.3,-4.6 30.8,-4.6 32.2,-3.2 32.2,-1.9 33.2,-0.9 69.2,-0.9 69.8,-1.5 69.8,-3.1 71,-4.3 P3.29@71,-5 ; U1.112 70.97,-5.13 P3.29@71.05,-5.05
pads on no net: J1. J1.11 J1.13 J2. J2.11 J2.13 J3. J3.11 J3.13 J4. J4.11 J4.13 J5. J5.11 J5.13 J7.S_1_H1 J7.S_1_H2 J7.S_2_H1 J7.S_2_H2 J7.S_3_H1 J7.S_3_H2 J7.S_4_H1 J7.S_4_H2 J8.2 P3.36 P4.36 U4.4

## Silkscreen, mask and mechanical layers (free items; w line width, h text height)
Mechanical 1:
  lines w0.254: 95,-90.014 0,-90.014 0,0 95,0 95,-90

## Text inside footprints (layer, text, board x,y; h text height)
P2: Top Overlay "2" at 27.217,-22.735 h1.27 r270; Top Overlay "1" at 24.677,-23.243 h1.27 r270; Top Overlay "7" at 24.677,-34.419 h1.27 r270; Top Overlay "8" at 27.217,-34.419 h1.27 r270
P3: Top Overlay "36" at 80.179,-2.968 h1.27; Top Overlay "35" at 80.179,-5.508 h1.27; Top Overlay "1" at 32.935,-5.508 h1.27; Top Overlay "2" at 32.427,-2.968 h1.27
P4: Top Overlay "36" at 89.068,-11.096 h1.27 r90; Top Overlay "35" at 91.608,-11.096 h1.27 r90; Top Overlay "1" at 91.608,-58.34 h1.27 r90; Top Overlay "2" at 89.068,-58.848 h1.27 r90